# Altium PCB Copy of PCB1.PcbDoc (part 1 of 2)
Units mm, origin at the board's own origin, x right, y up, seen from the top; angles counter-clockwise.
Board outline 245 x 100 mm, 2 copper layers (Top Layer, Bottom Layer); 174 components, 196 nets, 709 pads, 287 vias.
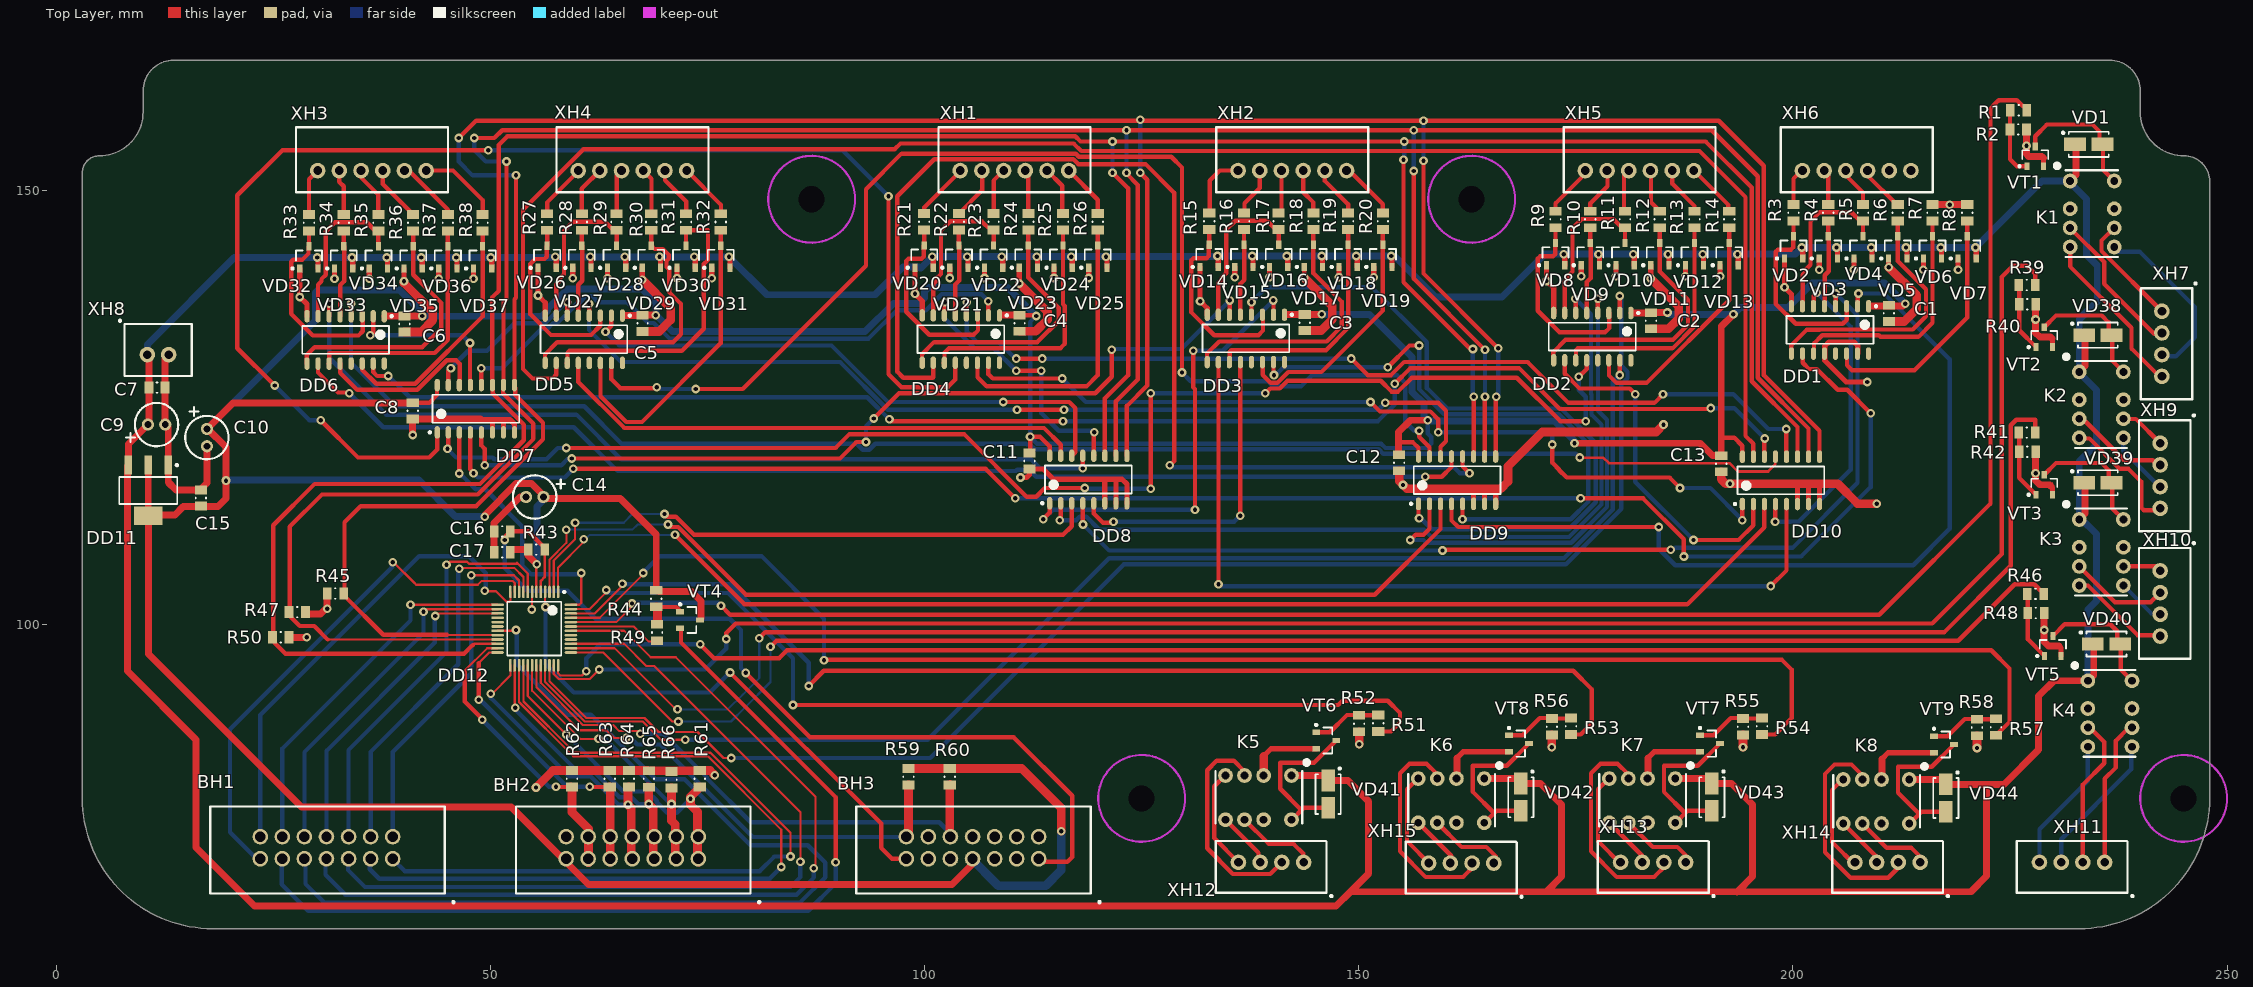
[diagram p0: Top Layer view]
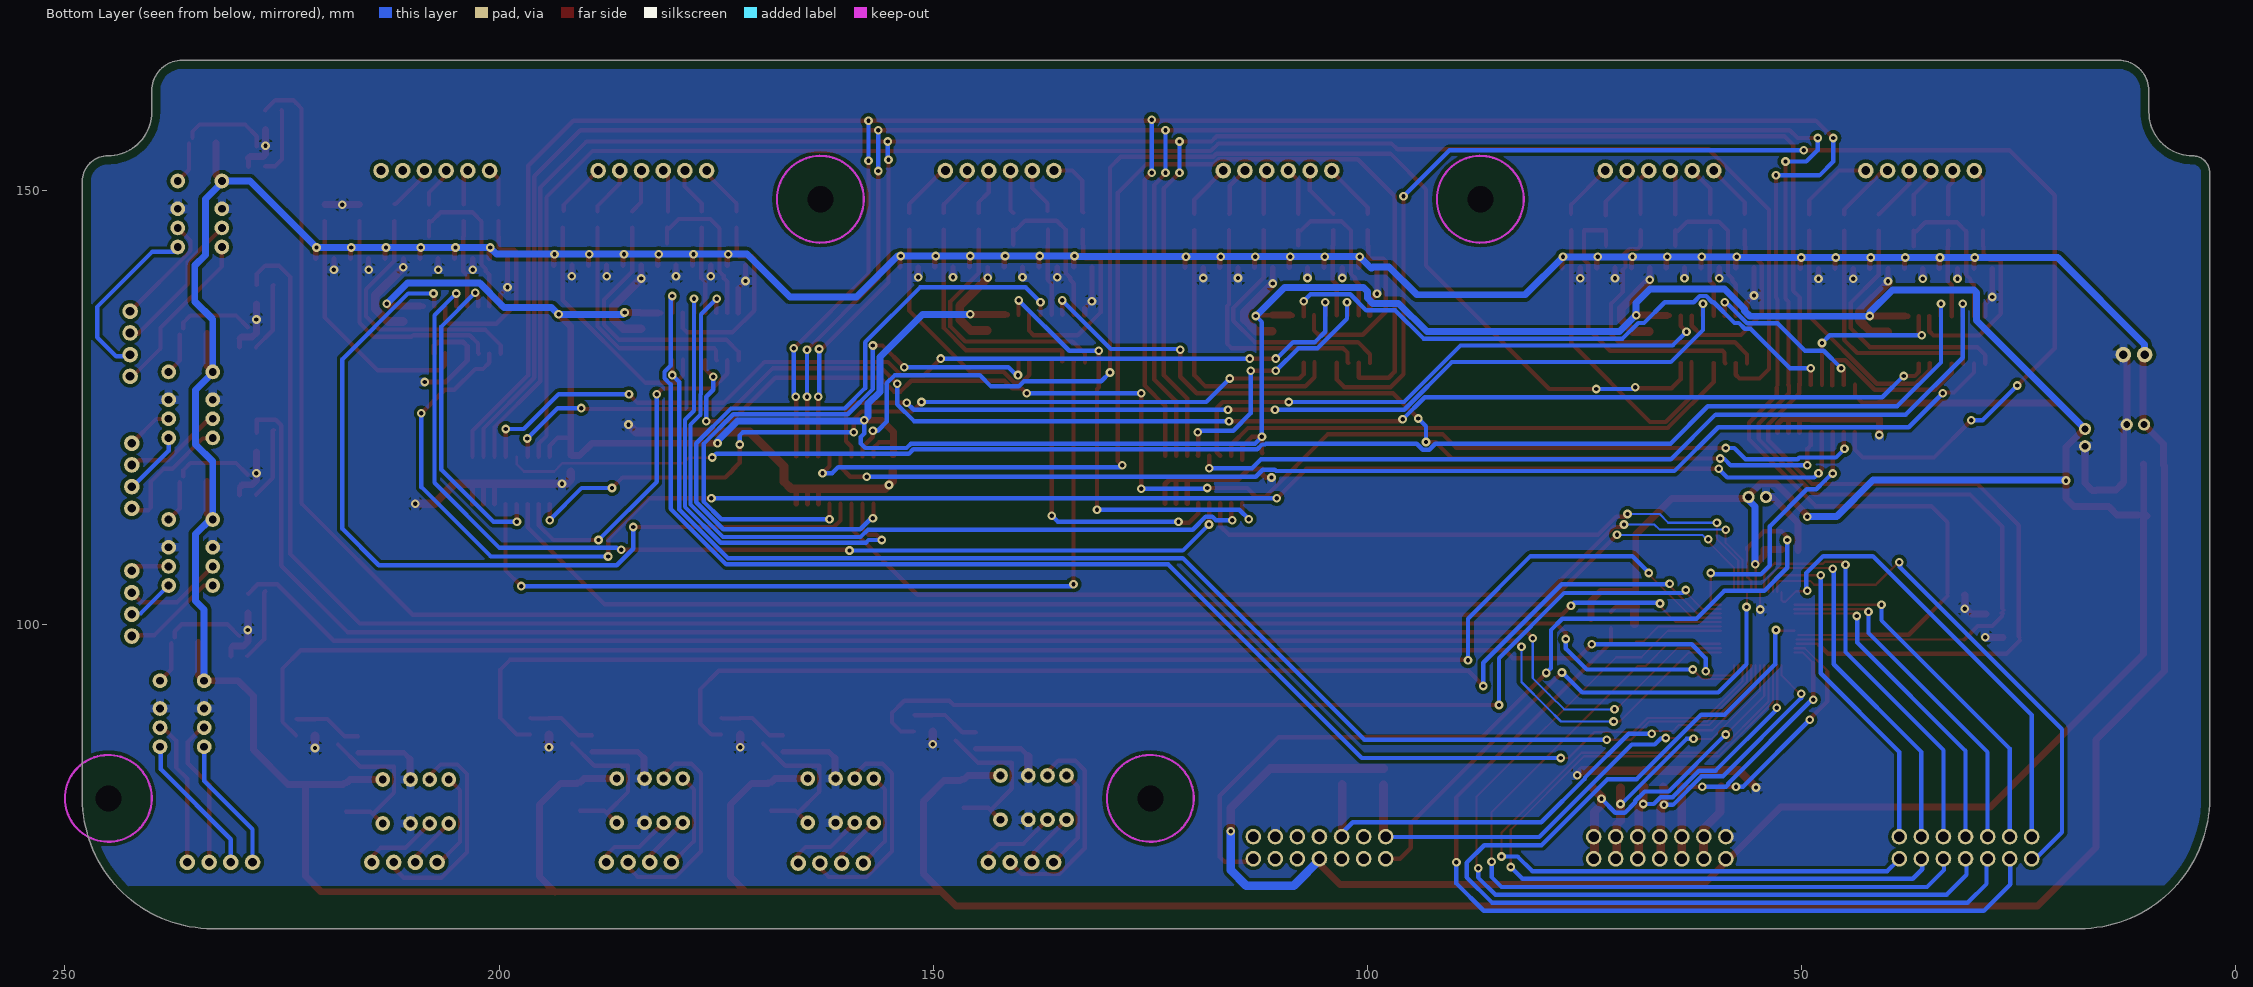
[diagram p1: Bottom Layer view, seen from below]

## Layer stack, top to bottom
Top Solder: solder mask 0.0102, Solder Resist, Dk 3.5
Top Layer: signal copper 0.0356
Dielectric 1: dielectric 0.32, FR-4, Dk 4.8
Bottom Layer: signal copper 0.0356
Bottom Solder: solder mask 0.0102, Solder Resist, Dk 3.5

## Board outline
3,80 3,152.05 cw(c4.95,152.05) 4.95,154 ccw(c4.95,159.05) 10,159.05 10,161.5 cw(c13.5,161.5) 13.5,165 236.5,165 cw(c236.5,161.5) 240,161.5 240,159.05 ccw(c245.05,159.05) 245.05,154 cw(c245.05,151.05) 248,151.05 248,80 cw(c233,80) 233,65 18,65 cw(c18,80)

## Design rules (kind name [scope] priority, off if disabled: settings)
BoardOutlineClearance [All] p1: gap=1 ignorepadtopadclearanceinfootprint=FALSE
Clearance Clearance_1 [All] p1: gap=0.15 ignorepadtopadclearanceinfootprint=FALSE except(0.4: Arc-Poly Track-Poly SMDPad-Poly THPad-Poly Via-Poly Fill-Poly Poly-Poly)
Clearance [All vs InPolygon] p2: gap=0.4 ignorepadtopadclearanceinfootprint=FALSE
PlaneConnect [All] p1: planeconnectstyle=Relief reliefexpansion=0.5 reliefentries=4 reliefconductorwidth=1 reliefairgap=0.5
PolygonConnect [All] p1: connectstyle=Relief reliefconductorwidth=1 reliefentries=4 polygonreliefangle="90 Angle" airgapwidth=0.4
RoutingVias [All] p1: holewidth=0.5 width=1 viastyle="Through Hole" minholewidth=0.5 minwidth=1 maxholewidth=0.5 maxwidth=1
SolderMaskExpansion [All] p1: expansion=0.102
Width Width_3 [InNet('+12')] p1: maxlimit=5 minlimit=0.3 preferedwidth=0.8
Width Width_2 [InNet('+3.3')] p2: maxlimit=8 minlimit=0.3 preferedwidth=0.8
Width Width_1 [InNet('GND')] p3: maxlimit=5 minlimit=0.25 preferedwidth=0.8
Width [All] p4: maxlimit=5 minlimit=0.25 preferedwidth=1
29 further rules are at their usual default settings.

## Classes and differential pairs
channel class РЕЛЕ: U_РЕЛЕ1 U_РЕЛЕ2 U_РЕЛЕ3 U_РЕЛЕ4 U_РЕЛЕ5 U_РЕЛЕ6 U_РЕЛЕ7 U_РЕЛЕ8
component class СОЕД: XH2 XH6 XH9 XH10 XH11 XH12 XH14 XH15
component class U_РЕЛЕ8: K5 R51 R52 VD41 VT6
component class U_РЕЛЕ7: K6 R53 R56 VD42 VT8
component class U_РЕЛЕ6: K7 R54 R55 VD43 VT7
component class U_РЕЛЕ5: K1 R1 R2 VD1 VT4
component class U_РЕЛЕ4: K3 R41 R42 VD39 VT3
component class U_РЕЛЕ3: K4 R46 R48 VD40 VT5
component class U_РЕЛЕ2: K8 R57 R58 VD44 VT9
component class U_РЕЛЕ1: K2 R39 R40 VD38 VT2
channel class "ВХ Б (1-6)": "in b1" "in b2" "in b3" "in b4" "in b5" "in b6"
component class U_УПРАВЛ: BH1 BH2 BH3 C14 C16 C17 DD7 R10 R14 R17 R18 R20 R44 R59 R60 R61 R62 R66 VT4
component class U_СОГЛАСОВАНИЕ: C5 C6 C7 C9 C13 C14 C15 C17 DD4 DD6 DD7 DD8 DD11 R7 R8 R45 XH1 XH2 XH3 XH4 XH5 XH6 XH7
component class "in b6": C9 DD7 R10 R14 R44 R45 R59 R60 VD8 VD9 VD10 VD11 VD12 VD13
component class "in b5": C14 DD11 R17 R18 R20 R61 R62 R66 VD14 VD15 VD16 VD17 VD18 VD19
component class "in b4": C15 DD4 R21 R22 R23 R24 R25 R26 VD20 VD21 VD22 VD23 VD24 VD25
component class "in b3": C5 DD8 R27 R28 R29 R30 R31 R32 VD26 VD27 VD28 VD29 VD30 VD31
component class "in b2": C6 DD6 R33 R34 R35 R36 R37 R38 VD32 VD33 VD34 VD35 VD36 VD37
component class "in b1": C1 DD1 R3 R4 R5 R6 R7 R8 VD2 VD3 VD4 VD5 VD6 VD7

## Components (designator, comment, footprint, x,y, rotation, side; value= is the part's Value field where it differs from the comment)
BH1 "BH14(2)" "BH-14 (DS1013-14S) (IDC-14MS)" 38.74,73.05 r180 top (schematic designator BH2)
BH2 "BH14(3)" "BH-14 (DS1013-14S) (IDC-14MS)" 73.95,73.05 r180 top (schematic designator BH3)
BH3 "BH-14 (DS1013-14S) (IDC-14MS)" "BH-14 (DS1013-14S) (IDC-14MS)" 113.14,73.05 r180 top (schematic designator BH1)
C1 "C(ceramic)" C(ceramic) 211.05,135.85 r270 top
C2 "C(ceramic)" C(ceramic) 183.669,135 r270 top (schematic designator C1)
C3 "C(ceramic)" C(ceramic) 143.779,134.8 r270 top (schematic designator C1)
C4 "C(ceramic)" C(ceramic) 110.95,134.725 r270 top (schematic designator C1)
C5 "C(ceramic)" C(ceramic) 67.529,134.7 r270 top (schematic designator C1)
C6 "C(ceramic)" C(ceramic) 40.1,134.629 r270 top (schematic designator C1)
C7 "C(ceramic)" C(ceramic) 11.6,127.304 r180 top (schematic designator C3)
C8 "C(ceramic)" C(ceramic) 41.05,124.625 r90 top (schematic designator C6)
C9 "C(AlEL)" C(AlEL) 12.55,123.05 r180 top (schematic designator C2)
C10 "C(AlEL)" C(AlEL) 17.35,120.554 r90 top (schematic designator C5)
C11 "C(ceramic)" C(ceramic) 112.081,118.85 r90 top (schematic designator C7)
C12 "C(ceramic)" C(ceramic) 154.65,118.65 r90 top (schematic designator C8)
C13 "C(ceramic)" C(ceramic) 191.75,118.55 r90 top (schematic designator C9)
C14 "C(AlEL)" C(AlEL) 54.1,114.711 r0 top (schematic designator C11)
C15 "C(ceramic)" C(ceramic) 16.65,114.6 r270 top (schematic designator C4)
C16 "C(ceramic)" C(ceramic) 51.35,110.75 r0 top (schematic designator C10)
C17 "C(ceramic)" C(ceramic) 51.35,108.35 r0 top (schematic designator C12)
DD1 "74HC4050" 74HC4050(51) 204.276,133.954 r270 top
DD2 "74HC4050" 74HC4050(51) 176.895,133.175 r270 top (schematic designator DD1)
DD3 "74HC4050" 74HC4050(51) 137.005,132.975 r270 top (schematic designator DD1)
DD4 "74HC4050" 74HC4050(51) 104.176,132.9 r270 top (schematic designator DD1)
DD5 "74HC4050" 74HC4050(51) 60.755,132.875 r270 top (schematic designator DD1)
DD6 "74HC4050" 74HC4050(51) 33.326,132.804 r270 top (schematic designator DD1)
DD7 "74HC4051" 74HC4050(51) 48.324,124.875 r90 top (schematic designator DD2)
DD8 "74HC4051" 74HC4050(51) 118.855,116.725 r90 top (schematic designator DD5)
DD9 "74HC4051" 74HC4050(51) 161.324,116.65 r90 top (schematic designator DD6)
DD10 "74HC4051" 74HC4050(51) 198.625,116.625 r90 top (schematic designator DD4)
DD11 "L1117" LDL1117 10.594,115.46 r270 top (schematic designator DD3)
DD12 "MSP430FR2355TPT" MSP430FR2355TPT 55.05,99.55 r270 top (schematic designator DD7)
K1 "IM06TS" IM06TS 231.929,151.1 r270 top
K2 "IM06TS" IM06TS 232.982,129.119 r270 top (schematic designator K1)
K3 "IM06TS" IM06TS 232.982,112.119 r270 top (schematic designator K1)
K4 "IM06TS" IM06TS 233.97,93.55 r270 top (schematic designator K1)
K5 "IM06TS" IM06TS 142.25,82.63 r180 top (schematic designator K1)
K6 "IM06TS" IM06TS 164.45,82.28 r180 top (schematic designator K1)
K7 "IM06TS" IM06TS 186.45,82.28 r180 top (schematic designator K1)
K8 "IM06TS" IM06TS 213.4,82.18 r180 top (schematic designator K1)
R1 "R" R 226,159.25 r180 top (schematic designator R21)
R2 "R" R 225.95,157.046 r180 top (schematic designator R22)
R3 "R" R 200.075,147.454 r270 top (schematic designator R1)
R4 "R" R 204.075,147.454 r270 top (schematic designator R2)
R5 "R" R 208.075,147.454 r270 top (schematic designator R3)
R6 "R" R 212.075,147.454 r270 top (schematic designator R4)
R7 "R" R 216.075,147.454 r270 top (schematic designator R5)
R8 "R" R 220.075,147.454 r270 top (schematic designator R6)
R9 "R" R 172.669,146.675 r270 top (schematic designator R1)
R10 "R" R 176.669,146.675 r270 top (schematic designator R2)
R11 "R" R 180.669,146.675 r270 top (schematic designator R3)
R12 "R" R 184.669,146.675 r270 top (schematic designator R4)
R13 "R" R 188.669,146.675 r270 top (schematic designator R5)
R14 "R" R 192.669,146.675 r270 top (schematic designator R6)
R15 "R" R 132.779,146.475 r270 top (schematic designator R1)
R16 "R" R 136.779,146.475 r270 top (schematic designator R2)
R17 "R" R 140.779,146.475 r270 top (schematic designator R3)
R18 "R" R 144.779,146.475 r270 top (schematic designator R4)
R19 "R" R 148.779,146.475 r270 top (schematic designator R5)
R20 "R" R 152.779,146.475 r270 top (schematic designator R6)
R21 "R" R 99.95,146.4 r270 top (schematic designator R1)
R22 "R" R 103.95,146.4 r270 top (schematic designator R2)
R23 "R" R 107.95,146.4 r270 top (schematic designator R3)
R24 "R" R 111.95,146.4 r270 top (schematic designator R4)
R25 "R" R 115.95,146.4 r270 top (schematic designator R5)
R26 "R" R 119.95,146.4 r270 top (schematic designator R6)
R27 "R" R 56.529,146.375 r270 top (schematic designator R1)
R28 "R" R 60.529,146.375 r270 top (schematic designator R2)
R29 "R" R 64.529,146.375 r270 top (schematic designator R3)
R30 "R" R 68.529,146.375 r270 top (schematic designator R4)
R31 "R" R 72.529,146.375 r270 top (schematic designator R5)
R32 "R" R 76.529,146.375 r270 top (schematic designator R6)
R33 "R" R 29.1,146.304 r270 top (schematic designator R1)
R34 "R" R 33.1,146.304 r270 top (schematic designator R2)
R35 "R" R 37.1,146.304 r270 top (schematic designator R3)
R36 "R" R 41.1,146.304 r270 top (schematic designator R4)
R37 "R" R 45.1,146.304 r270 top (schematic designator R5)
R38 "R" R 49.1,146.304 r270 top (schematic designator R6)
R39 "R" R 226.952,139.119 r180 top (schematic designator R21)
R40 "R" R 227.002,136.915 r180 top (schematic designator R22)
R41 "R" R 226.952,122.119 r180 top (schematic designator R21)
R42 "R" R 227.002,119.915 r180 top (schematic designator R22)
R43 "R" R 55.3,108.65 r180 top (schematic designator R10)
R44 "R" R 69.1,103.014 r90 top (schematic designator R13)
R45 "R" R 32.15,103.6 r0 top (schematic designator R9)
R46 "R" R 227.941,103.55 r180 top (schematic designator R21)
R47 "R" R 27.75,101.45 r180 top (schematic designator R8)
R48 "R" R 227.991,101.346 r180 top (schematic designator R22)
R49 "R" R 69.2,99.1 r90 top (schematic designator R14)
R50 "R" R 25.85,98.55 r180 top (schematic designator R7)
R51 "R" R 152.25,88.659 r90 top (schematic designator R21)
R52 "R" R 150.046,88.609 r90 top (schematic designator R22)
R53 "R" R 174.45,88.309 r90 top (schematic designator R21)
R54 "R" R 196.45,88.309 r90 top (schematic designator R21)
R55 "R" R 194.246,88.259 r90 top (schematic designator R22)
R56 "R" R 172.246,88.259 r90 top (schematic designator R22)
R57 "R" R 223.4,88.209 r90 top (schematic designator R21)
R58 "R" R 221.196,88.159 r90 top (schematic designator R22)
R59 "R" R 98.15,82.5 r90 top (schematic designator R12)
R60 "R" R 102.9,82.5 r90 top (schematic designator R11)
R61 "R" R 74.1,82.256 r270 top (schematic designator R15)
R62 "R" R 59.396,82.256 r270 top (schematic designator R19)
R63 "R" R 63.737,82.256 r270 top (schematic designator R20)
R64 "R" R 65.942,82.256 r270 top (schematic designator R18)
R65 "R" R 68.25,82.25 r270 top (schematic designator R17)
R66 "R" R 70.85,82.156 r270 top (schematic designator R16)
VD1 "SS14" SS14 234.07,155.329 r0 top (schematic designator VD7)
VD2 "BAV99" BAV99 200.075,143.454 r90 top (schematic designator VD1)
VD3 "BAV99" BAV99 204.075,143.454 r90 top (schematic designator VD2)
VD4 "BAV99" BAV99 208.075,143.454 r90 top (schematic designator VD3)
VD5 "BAV99" BAV99 212.075,143.454 r90 top (schematic designator VD4)
VD6 "BAV99" BAV99 216.075,143.454 r90 top (schematic designator VD5)
VD7 "BAV99" BAV99 220.075,143.454 r90 top (schematic designator VD6)
VD8 "BAV99" BAV99 172.669,142.675 r90 top (schematic designator VD1)
VD9 "BAV99" BAV99 176.669,142.675 r90 top (schematic designator VD2)
VD10 "BAV99" BAV99 180.669,142.675 r90 top (schematic designator VD3)
VD11 "BAV99" BAV99 184.669,142.675 r90 top (schematic designator VD4)
VD12 "BAV99" BAV99 188.669,142.675 r90 top (schematic designator VD5)
VD13 "BAV99" BAV99 192.669,142.675 r90 top (schematic designator VD6)
VD14 "BAV99" BAV99 132.779,142.475 r90 top (schematic designator VD1)
VD15 "BAV99" BAV99 136.779,142.475 r90 top (schematic designator VD2)
VD16 "BAV99" BAV99 140.779,142.475 r90 top (schematic designator VD3)
VD17 "BAV99" BAV99 144.779,142.475 r90 top (schematic designator VD4)
VD18 "BAV99" BAV99 148.779,142.475 r90 top (schematic designator VD5)
VD19 "BAV99" BAV99 152.779,142.475 r90 top (schematic designator VD6)
VD20 "BAV99" BAV99 99.95,142.4 r90 top (schematic designator VD1)
VD21 "BAV99" BAV99 103.95,142.4 r90 top (schematic designator VD2)
VD22 "BAV99" BAV99 107.95,142.4 r90 top (schematic designator VD3)
VD23 "BAV99" BAV99 111.95,142.4 r90 top (schematic designator VD4)
VD24 "BAV99" BAV99 115.95,142.4 r90 top (schematic designator VD5)
VD25 "BAV99" BAV99 119.95,142.4 r90 top (schematic designator VD6)
VD26 "BAV99" BAV99 56.529,142.375 r90 top (schematic designator VD1)
VD27 "BAV99" BAV99 60.529,142.375 r90 top (schematic designator VD2)
VD28 "BAV99" BAV99 64.529,142.375 r90 top (schematic designator VD3)
VD29 "BAV99" BAV99 68.529,142.375 r90 top (schematic designator VD4)
VD30 "BAV99" BAV99 72.529,142.375 r90 top (schematic designator VD5)
VD31 "BAV99" BAV99 76.529,142.375 r90 top (schematic designator VD6)
VD32 "BAV99" BAV99 29.1,142.304 r90 top (schematic designator VD1)
VD33 "BAV99" BAV99 33.1,142.304 r90 top (schematic designator VD2)
VD34 "BAV99" BAV99 37.1,142.304 r90 top (schematic designator VD3)
VD35 "BAV99" BAV99 41.1,142.304 r90 top (schematic designator VD4)
VD36 "BAV99" BAV99 45.1,142.304 r90 top (schematic designator VD5)
VD37 "BAV99" BAV99 49.1,142.304 r90 top (schematic designator VD6)
VD38 "SS14" SS14 235.122,133.348 r0 top (schematic designator VD7)
VD39 "SS14" SS14 235.122,116.348 r0 top (schematic designator VD7)
VD40 "SS14" SS14 236.111,97.779 r0 top (schematic designator VD7)
VD41 "SS14" SS14 146.479,80.489 r270 top (schematic designator VD7)
VD42 "SS14" SS14 168.679,80.139 r270 top (schematic designator VD7)
VD43 "SS14" SS14 190.679,80.139 r270 top (schematic designator VD7)
VD44 "SS14" SS14 217.629,80.039 r270 top (schematic designator VD7)
VT1 "BC837(КТ3130)" BC847(IRLML6402) 227.9,153.942 r90 top (schematic designator VT2)
VT2 "BC837(КТ3130)" BC847(IRLML6402) 228.953,133.119 r90 top
VT3 "BC837(КТ3130)" BC847(IRLML6402) 228.953,116.119 r90 top (schematic designator VT2)
VT4 "IRLML6402" BC847(IRLML6402) 73,100.55 r0 top (schematic designator VT1)
VT5 "BC837(КТ3130)" BC847(IRLML6402) 229.941,97.55 r90 top (schematic designator VT2)
VT6 "BC837(КТ3130)" BC847(IRLML6402) 146.25,86.659 r0 top (schematic designator VT2)
VT7 "BC837(КТ3130)" BC847(IRLML6402) 190.45,86.309 r0 top (schematic designator VT2)
VT8 "BC837(КТ3130)" BC847(IRLML6402) 168.45,86.309 r0 top (schematic designator VT2)
VT9 "BC837(КТ3130)" BC847(IRLML6402) 217.4,86.209 r0 top (schematic designator VT2)
XH1 "ХH(6)" XH(6) 104.1,152.304 r0 top (schematic designator XH4)
XH2 "ХH(6)" XH(6) 136.1,152.304 r0 top (schematic designator XH5)
XH3 "ХH(6)" XH(6) 30.1,152.304 r0 top (schematic designator XH1)
XH4 "ХH(6)" XH(6) 60.1,152.304 r0 top (schematic designator XH3)
XH5 "ХH(6)" XH(6) 176.1,152.304 r0 top (schematic designator XH6)
XH6 "ХH(6)" XH(6) 201.1,152.304 r0 top (schematic designator XH7)
XH7 "ХН(4)" ХН(4) 242.5,136.1 r270 top (schematic designator XH11)
XH8 "ХН(2)" ХН(2) 10.492,131.11 r0 top (schematic designator XH2)
XH9 "ХН(4)" ХН(4) 242.3,120.9 r270 top (schematic designator XH15)
XH10 "ХН(4)" ХН(4) 242.3,106.2 r270 top (schematic designator XH12)
XH11 "ХН(4)" ХН(4) 235.9,72.63 r180 top (schematic designator XH13)
XH12 "ХН(4)" ХН(4) 143.65,72.63 r180 top (schematic designator XH8)
XH13 "ХН(4)" ХН(4) 187.65,72.63 r180 top (schematic designator XH10)
XH14 "ХН(4)" ХН(4) 214.65,72.63 r180 top
XH15 "ХН(4)" ХН(4) 165.55,72.55 r180 top (schematic designator XH9)

## Footprints (in the part's own frame and the unit in brackets; to place one, negate y for a bottom-side part, rotate by r counter-clockwise, add the part's x,y. Pads: shape width x height; smd on the part's side, far side on the other; paste and mask are expansions set on the pad)
74HC4050(51) [mm]
  oval 1.45x0.6 smd: 1(-2.725,4.445) 2(-2.725,3.175) 3(-2.725,1.905) 4(-2.725,0.635) 5(-2.725,-0.635) 6(-2.725,-1.905) 7(-2.725,-3.175) 8(-2.725,-4.445) 9(2.725,-4.445) 10(2.725,-3.175) 11(2.725,-1.905) 12(2.725,-0.635) 13(2.725,0.635) 14(2.725,1.905) 15(2.725,3.175) 16(2.725,4.445)
  silkscreen extent -2.85,-5 1.6,5.42, body extent -3,-5 3,5, height 1.75
BAV99 [mm] "SOT23, 3-Leads, Body 2,90x2,45mm, Pitch 1,05mm, IPC Medium Density"
  rect 0.95x0.6 smd: 1(-1.275,1.05) 2(-1.275,-1.05) 3(1.275,0)
  silkscreen extent -1.4,-1.5 0.8,2.02, body extent -1.4,-1.5 1.4,1.5, height 1.3
BC847(IRLML6402) [mm] "SOT23, 3-Leads, Body 2,80x2,30mm, Pitch 0,95mm, IPC Medium Density"
  rect 0.9x0.6 smd: 1(-1.15,0.95) 2(-1.15,-0.95) 3(1.15,0)
  silkscreen extent -1.27,-1.5 0.7,1.92, body extent -1.3,-1.5 1.3,1.5, height 1.1
"BH-14 (DS1013-14S) (IDC-14MS)" [mm]
  round 1.8 hole 1.2: 1(0,0) 2(2.54,0) 3(5.08,0) 4(7.62,0) 5(10.16,0) 6(12.7,0) 7(15.24,0) 8(0,-2.54) 9(2.54,-2.54) 10(5.08,-2.54) 11(7.62,-2.54) 12(10.16,-2.54) 13(12.7,-2.54) 14(15.24,-2.54)
  silkscreen extent -7.13,-6 21,5.12, body extent -5.1,-5.7 20.3,3.65, height 10.25
C(AlEL) [mm]
  round 1.4 hole 0.8: 1(2,0) 2(0,0)
  silkscreen extent -1.5,-2.5 4.5,2.5, body extent -1.5,-2.5 3.5,2.5, height 12
C(ceramic) [mm] "Chip Capacitor, 2-Leads, Body 2,00x1,25mm, IPC Medium Density"
  rect 1x1.4 smd: 1(-0.925,0) 2(0.925,0)
  silkscreen extent -0.05,-0.6 0.05,0.6, body extent -1,-0.63 1,0.63, height 1.3
IM06TS [mm]
  round 1.7 hole 0.9: 1(0,0) 2(3.2,0) 3(5.4,0) 4(7.6,0) 5(7.6,5.08) 6(5.4,5.08) 7(3.2,5.08) 8(0,5.08)
  silkscreen extent -2,-1.75 8.75,5.5, body extent -1.25,-0.5 8.75,5.5, height 5.4
LDL1117 [mm]
  rect 2.15x0.9 smd: 1(-2.925,2.3) 2(-2.925,0) 3(-2.925,-2.3)
  rect 2.15x3.25 smd: 2(2.925,0)
  silkscreen extent -3.05,-3.35 1.55,3.43, body extent -3.5,-3.35 3.5,3.35, height 1.8
MSP430FR2355TPT [mm] "TSQFP, 48-Leads, Body 7,00x7,00mm, Pitch 0,50mm, IPC Medium Density"
  oval 1.45x0.3 smd: 1(-4.225,2.75) 2(-4.225,2.25) 3(-4.225,1.75) 4(-4.225,1.25) 5(-4.225,0.75) 6(-4.225,0.25) 7(-4.225,-0.25) 8(-4.225,-0.75) 9(-4.225,-1.25) 10(-4.225,-1.75) 11(-4.225,-2.25) 12(-4.225,-2.75) 25(4.225,-2.75) 26(4.225,-2.25) 27(4.225,-1.75) 28(4.225,-1.25) 29(4.225,-0.75) 30(4.225,-0.25) 31(4.225,0.25) 32(4.225,0.75) 33(4.225,1.25) 34(4.225,1.75) 35(4.225,2.25) 36(4.225,2.75)
  oval 0.3x1.45 smd: 13(-2.75,-4.225) 14(-2.25,-4.225) 15(-1.75,-4.225) 16(-1.25,-4.225) 17(-0.75,-4.225) 18(-0.25,-4.225) 19(0.25,-4.225) 20(0.75,-4.225) 21(1.25,-4.225) 22(1.75,-4.225) 23(2.25,-4.225) 24(2.75,-4.225) 37(2.75,4.225) 38(2.25,4.225) 39(1.75,4.225) 40(1.25,4.225) 41(0.75,4.225) 42(0.25,4.225) 43(-0.25,4.225) 44(-0.75,4.225) 45(-1.25,4.225) 46(-1.75,4.225) 47(-2.25,4.225) 48(-2.75,4.225)
  silkscreen extent -4.35,-3.1 3.1,3.58, body extent -4.5,-4.5 4.5,4.5, height 1.6
R [mm] "Chip Resistor, 2-Leads, Body 2,10x1,30mm, IPC Medium Density"
  rect 1x1.4 smd: 1(-0.95,0) 2(0.95,0)
  silkscreen extent -0.05,-0.6 0.05,0.6, body extent -1.1,-0.7 1.1,0.7, height 0.6
SS14 [mm] "Molded Diode, 2-Leads, Body 4,30x2,70mm, IPC Medium Density"
  rect 2.5x1.55 smd: 1(-1.575,0) 2(1.575,0)
  silkscreen extent -3.07,-1.45 2.3,1.45, body extent -2.52,-1.45 2.52,1.45, height 2.44
XH(6) [mm]
  round 1.8 hole 1: 1(0,0) 2(2.5,0) 3(5,0) 4(7.5,0) 5(10,0) 6(12.5,0)
  silkscreen extent -2.5,-2.5 15,5, body extent -2.45,-2.35 14.95,3.4, height 7
ХН(2) [mm]
  round 1.8 hole 1: 1(0,0) 2(2.45,0)
  silkscreen extent -3.27,-2.45 5.1,4.02, body extent -2.55,-2.32 4.95,3.38, height 7
ХН(4) [mm]
  round 1.8 hole 1: 1(0,0) 2(2.5,0) 3(5,0) 4(7.5,0)
  silkscreen extent -3.32,-2.45 10.13,4, body extent -2.53,-2.3 9.98,3.4, height 7

## Part data
DD11: library part LDL1117

## Free pads (board coordinates)
  round 1.6 hole 3 unplated: *(87,149) *(125,80) *(163,149) *(245,80)

## Via types
v1: diameter 1, hole 0.5, Top Layer to Bottom Layer, tented both sides, 287 vias

## Nets (pads, with @x,y where several pads share a name; then routed paths per layer and width w, separated by ;. In a path a pad name is that pad's centre, name@x,y a point inside that pad or via, vN(x,y) a via of type N, cw(c..) or ccw(c..) an arc to the next point about the centre after c; other vN are vias at no path point)
1Y1: DD6.2 DD7.13 | length 19
  Top Layer w0.5: v1(36.15,133.35) 36.501,133.701 DD6.2@36.501,135.529 ; DD7.13@47.65,127.65 v1(47.65,132.45)
  Bottom Layer w0.5: v1(36.15,133.35) 46.75,133.35 v1(47.65,132.45)
1Y2: DD5.2 DD8.14 | length 65.5
  Top Layer w0.5: v1(63.25,133.75) 63.93,134.43 DD5.2@63.93,135.6 ; v1(109.05,125.65) 116.65,125.65 117.35,124.95 117.35,119.85 DD8.14@116.95,119.45
  Bottom Layer w0.5: v1(63.25,133.75) 64.85,132.15 89.288,132.15 95.788,125.65 v1(109.05,125.65)
1Y3: DD4.2 DD7.12 | length 70
  Top Layer w0.5: DD7.12@48.95,127.609 DD7.12@48.959,127.6 v1(48.959,129.541) ; DD4.2@107.35,135.5 v1(107.35,137.25)
  Bottom Layer w0.5: v1(48.959,129.541) 51.341,129.541 55.875,134.075 56.541,134.075 57.216,134.75 57.723,134.75 60.123,137.15 60.277,137.15 60.977,137.85 61.723,137.85 62.423,137.15 65.75,137.15 68.15,134.75 68.819,134.75 70.619,132.95 93.55,132.95 96.8,136.2 100.127,136.2 101.977,138.05 106.55,138.05 v1(107.35,137.25)
1Y4: DD3.2 DD8.1 | length 51.9
  Top Layer w0.5: v1(113.65,112.15) 114.41,112.91 DD8.1@114.41,114 ; v1(130.95,131.55) 130.95,127.35 131.15,127.15 v1(131.15,113.25) ; v1(140.15,137.35) 140.18,137.32 DD3.2@140.18,135.7
  Bottom Layer w0.5: v1(113.65,112.15) 114.75,113.25 v1(131.15,113.25) ; v1@130.85,131.55 v1(130.95,131.55) 134.35,131.55 v1(140.15,137.35)
1Y6: DD1.2 DD9.4 | length 99.3
  Top Layer w0.5: DD9.4@160.689,113.925 160.689,112.011 161.45,111.25 v1(184.55,111.25) ; DD1.2@207.476,136.679 207.476,138.076 v1(207.55,138.15)
  Bottom Layer w0.5: v1(184.55,111.25) 184.55,108.75 186.45,106.85 213.85,106.85 218.05,111.05 218.05,130.577 210.477,138.15 v1(207.55,138.15)
2Y1: DD6.4 DD10.13 | length 179.2
  Top Layer w0.3: v1(175.45,119.25) 178.15,119.25 178.8,118.6 192.7,118.6 193.65,117.65 197.15,117.65 197.99,118.49 DD10.13@197.99,119.35
  Top Layer w0.5: v1(33.95,136.95) 33.961,136.939 DD6.4@33.961,135.529
  Bottom Layer w0.5: v1(33.95,136.95) 33.95,130.2 39,125.15 60.8,125.15 65.1,120.85 92.177,120.85 92.877,120.15 93.623,120.15 94.323,120.85 111.677,120.85 111.777,120.75 112.131,120.75 112.681,120.2 152.308,120.2 152.808,119.7 175,119.7 v1(175.45,119.25)
2Y2: DD5.4 DD9.14 | length 113.2
  Top Layer w0.5: DD5.4@61.35,135.64 DD5.4@61.39,135.6 61.39,136.91 v1(61.35,136.95) ; v1(110.65,124.75) v1(116.05,124.75) ; v1(153.05,125.55) 159.15,125.55 160.05,124.65 160.05,121.13 159.419,120.5 DD9.14@159.419,119.375
  Bottom Layer w0.5: v1(61.35,136.95) 61.35,133.95 65.05,130.25 90.269,130.25 95.769,124.75 v1(110.65,124.75) ; v1(116.05,124.75) 152.25,124.75 v1(153.05,125.55)
2Y3: DD4.4 DD10.12 | length 109.7
  Top Layer w0.5: DD4.4@104.811,135.625 104.811,137.111 v1(104.85,137.15) ; v1(110.55,130.65) v1(113.55,130.65) ; v1(149.15,130.65) 151.05,128.75 153.723,128.75 155.223,130.25 169.45,130.25 174.15,125.55 184.05,125.55 v1(185.05,126.55) ; v1(199.25,122.55) 199.25,119.36 DD10.12@199.26,119.35
  Bottom Layer w0.5: v1(104.85,137.15) 104.85,133.75 106.05,132.55 108.55,132.55 110.45,130.65 v1(110.55,130.65) ; v1(113.55,130.65) v1(149.15,130.65) ; v1(185.05,126.55) 193.15,126.55 197.15,122.55 v1(199.25,122.55) ; v1(149.15,130.65) 149.25,130.75 149.35,130.75 149.25,130.65 v1(149.15,130.65)
2Y4: DD3.4 DD9.1 | length 83
  Top Layer w0.5: DD3.4@137.64,135.7 137.65,135.69 v1(137.65,137.15) ; DD9.1@156.879,113.925 156.879,112.321 v1(156.95,112.25)
  Bottom Layer w0.5: v1(137.65,137.15) 139.35,138.85 151.523,138.85 157.85,132.523 157.85,127.25 160.2,124.9 173.292,124.9 177.3,120.892 177.3,114.108 174.184,110.992 158.4,110.992 157.142,112.25 v1(156.95,112.25)
2Y5: DD2.4 DD9.2 | length 56.2
  Top Layer w0.5: v1(155.95,109.75) 156.55,110.35 157.45,110.35 158.149,111.049 DD9.2@158.149,113.925 ; DD2.4@177.53,135.9 177.53,137.53 v1(177.55,137.55)
  Bottom Layer w0.5: v1(155.95,109.75) 157.45,109.75 157.75,109.45 174.48,109.45 178.6,113.57 178.6,123.6 177.55,124.65 v1(177.55,137.55)
2Y6: DD1.4 DD8.4 | length 120.4
  Top Layer w0.5: DD8.4@118.22,114 118.22,111.58 v1(118.25,111.55) ; v1(159.65,108.55) 159.75,108.65 v1(185.95,108.65) ; DD1.4@204.936,136.679 204.936,138.136 v1(204.95,138.15)
  Bottom Layer w0.5: v1(118.25,111.55) 121.25,108.55 v1(159.65,108.55) ; v1(185.95,108.65) 186.25,108.65 186.45,108.85 199.95,108.85 207.45,116.35 207.45,135.65 v1(204.95,138.15)
3Y1: DD6.6 DD8.13 | length 101.1
  Top Layer w0.5: DD6.6@31.421,135.529 31.421,136.921 v1(31.45,136.95) ; v1(118.22,118.02) DD8.13@118.22,119.45
  Bottom Layer w0.5: v1(31.45,136.95) 31.45,130.75 38,124.2 59.9,124.2 65.05,119.05 112.258,119.05 113.288,118.02 v1(118.22,118.02)
3Y2: DD5.6 DD7.15 | length 20.2
  Top Layer w0.5: DD7.15@45.149,127.6 45.149,129.249 v1(45.45,129.55) ; DD5.6@58.85,135.55 DD5.6@58.85,135.6 v1(58.85,137.15)
  Bottom Layer w0.5: v1(45.45,129.55) 47.45,131.55 49.6,131.55 52.775,134.725 56.271,134.725 58.696,137.15 v1(58.85,137.15)
3Y3: DD4.6 DD8.12 | length 31.8
  Top Layer w0.5: DD4.6@102.271,135.625 102.271,137.071 v1(102.35,137.15) ; v1(110.55,129.25) v1(113.45,129.25) ; DD8.12@119.55,119.51 DD8.12@119.49,119.45 119.49,122.09 v1(119.55,122.15)
  Bottom Layer w0.5: v1(102.35,137.15) 102.35,135.25 105.75,131.85 107.95,131.85 v1(110.55,129.25) ; v1(113.45,129.25) 113.45,124.35 115.45,122.35 119.35,122.35 v1(119.55,122.15)
3Y4: DD3.6 DD7.5 | length 102.2
  Top Layer w0.5: DD7.5@48.959,122.15 48.959,120.641 49.35,120.25 v1(49.35,118.35) ; v1(59.35,119.15) 90.25,119.15 92.15,121.05 v1(93.25,121.05) ; v1(94.15,123.75) 97.05,126.65 116.55,126.65 119.65,126.65 121.55,128.55 v1(121.55,131.65) ; DD3.6@135.1,135.7 135.15,135.75 v1(135.15,137.35)
  Bottom Layer w0.5: v1(49.35,118.35) 58.15,118.35 58.95,119.15 v1(59.35,119.15) ; v1(93.25,121.05) 93.25,122.85 v1(94.15,123.75) ; v1(121.55,131.65) 121.55,131.75 129.55,131.75 v1(135.15,137.35)
3Y5: DD2.6 DD8.2 | length 93.7
  Top Layer w0.5: v1(115.55,112.05) 115.68,112.18 DD8.2@115.68,114 ; v1(174.95,137.55) 174.99,137.51 DD2.6@174.99,135.9
  Bottom Layer w0.5: v1(115.55,112.05) 117.477,112.05 117.877,112.45 118.623,112.45 120.123,110.95 157.523,110.95 158.373,110.1 174.211,110.1 177.95,113.839 177.95,123.05 176.8,124.2 176.8,126.519 176.75,126.569 176.75,135.75 v1(174.95,137.55)
3Y6: DD1.6 DD10.4 | length 37
  Top Layer w0.5: v1(197.95,111.85) 197.95,113.86 DD10.4@197.99,113.9 ; DD1.6@202.396,136.679 202.396,137.896 v1(202.75,138.25)
  Bottom Layer w0.5: v1(197.95,111.85) 200.65,111.85 206.65,117.85 206.65,134.35 v1(202.75,138.25)
4Y1: DD6.10 DD9.13 | length 138.3
  Top Layer w0.5: DD6.10@30.151,130.079 30.151,129.049 32.45,126.75 33.65,126.75 v1(33.75,126.65) ; v1(157.65,117.05) 159.567,117.05 160.689,118.172 DD9.13@160.689,119.375
  Bottom Layer w0.5: v1(33.75,126.65) 37.65,122.75 59.6,122.75 64.65,117.7 110.527,117.7 110.677,117.85 112.05,117.85 112.85,117.05 v1(157.65,117.05)
4Y2: DD5.10 DD10.15 | length 201
  Top Layer w0.5: DD5.10@57.58,130.15 57.58,128.78 57.15,128.35 54.85,128.35 53.75,129.45 53.75,147.792 60.708,154.75 96.55,154.75 97.219,155.419 117.162,155.419 118.031,154.55 189.25,154.55 194.55,149.25 194.55,121.75 195.45,120.85 DD10.15@195.45,119.35
4Y3: DD4.10 DD9.12 | length 130.3
  Top Layer w0.5: DD4.10@101.001,130.175 101.001,128.501 100.95,128.45 97.55,128.45 96.85,129.15 96.85,149.35 101.104,153.604 117.139,153.604 117.693,153.05 125.436,153.05 128.75,149.736 128.75,118.85 v1(128.25,118.35) ; DD9.12@161.959,119.375 161.959,118.241 v1(162.75,117.45)
  Bottom Layer w0.5: v1(128.25,118.35) 128.45,118.15 160.95,118.15 161.65,117.45 v1(162.75,117.45)
4Y4: DD3.10 DD10.5 | length 99.5
  Top Layer w0.5: DD3.10@133.83,130.25 133.85,130.23 v1(133.85,104.65) ; v1(197.45,104.45) 199.26,106.26 DD10.5@199.26,113.9
  Bottom Layer w0.5: v1(133.85,104.65) 134.05,104.45 v1(197.45,104.45)
4Y5: DD2.10 DD10.2 | length 40.3
  Top Layer w0.5: DD2.10@173.72,130.45 173.72,128.907 175.427,127.2 181.2,127.2 v1(181.85,126.55) ; v1(188.55,109.75) 193.75,109.75 195.45,111.45 DD10.2@195.45,113.9
  Bottom Layer w0.5: v1(181.85,126.55) 181.85,116.45 v1(188.55,109.75)
4Y6: DD1.10 DD7.4 | length 194.8
  Top Layer w0.5: DD7.4@47.689,122.15 47.689,117.911 48.05,117.55 v1(48.05,117.45) ; v1(59.55,117.95) 107.05,117.95 v1(110.45,114.55) ; v1(175.55,114.55) 182.75,114.55 187.45,109.85 v1(187.45,107.85) ; DD1.10@201.126,131.229 201.126,130.174 201.85,129.45 202.76,129.45 205.16,127.05 206.25,127.05 v1(208.95,124.35)
  Bottom Layer w0.5: v1(48.05,117.45) 48.55,116.95 58.55,116.95 v1(59.55,117.95) ; v1(110.45,114.55) v1(175.55,114.55) ; v1(187.45,107.85) 200.95,107.85 208.95,115.85 v1(208.95,124.35)
5Y1: DD6.12 DD7.14 | length 19.7
  Top Layer w0.5: DD6.12@32.691,130.079 32.691,129.009 34.65,127.05 41.569,127.05 44.969,130.45 46.05,130.45 46.45,130.05 DD7.14@46.45,127.55
5Y2: DD5.12 DD8.15 | length 62.1
  Top Layer w0.5: DD5.12@60.15,130.12 DD5.12@60.12,130.15 60.12,127.961 65.431,122.65 113.75,122.65 115.68,120.72 DD8.15@115.68,119.45
5Y3: DD4.12 DD7.1 | length 158.7
  Top Layer w0.5: v1(25.15,127.55) 20.85,131.85 20.85,149.45 26.05,154.65 v1(49.75,154.65) ; v1(30.45,123.55) 34.75,119.25 42.95,119.25 43.879,120.179 DD7.1@43.879,122.15 ; v1(95.85,149.35) 95.85,128.85 97.35,127.35 102.65,127.35 103.541,128.241 DD4.12@103.541,130.175
  Bottom Layer w0.5: v1(25.15,127.55) 29.15,123.55 v1(30.45,123.55) ; v1(49.75,154.65) 90.55,154.65 v1(95.85,149.35)
5Y4: DD3.12 DD8.5 | length 36.5
  Top Layer w0.5: DD8.5@119.49,114 119.49,112.81 120.55,111.75 121.65,111.75 v1(121.75,111.85) ; v1(136.35,112.55) 136.35,130.23 DD3.12@136.37,130.25
  Bottom Layer w0.5: v1(121.75,111.85) 135.65,111.85 v1(136.35,112.55)
5Y5: DD2.12 DD7.2 | length 160.8
  Top Layer w0.5: v1(45.05,120.25) 45.149,120.349 DD7.2@45.149,122.15 ; v1(58.75,120.35) 89.75,120.35 91.35,121.95 104.55,121.95 111.75,114.75 112.85,114.75 113.85,115.75 v1(118.45,115.75) v1@118.55,115.75 ; v1(126.05,115.65) v1(126.05,126.65) ; v1(139.25,126.65) 139.8,127.2 140.892,127.2 141.792,128.1 152.527,128.1 153.777,126.85 154.523,126.85 156.123,128.45 168.2,128.45 173.2,123.45 v1(176.15,123.45) ; v1(175.35,128.55) 176.26,129.46 DD2.12@176.26,130.45
  Bottom Layer w0.5: v1(45.05,120.25) 46.05,119.25 50.25,119.25 50.45,119.05 56.45,119.05 57.75,120.35 v1(58.75,120.35) ; v1(118.45,115.75) 118.55,115.65 v1(126.05,115.65) ; v1(126.05,126.65) v1(139.25,126.65) ; v1(175.35,128.55) 175.35,127.05 176.15,126.25 v1(176.15,123.45)
6Y1: DD6.15 DD10.14 | length 173
  Top Layer w0.5: DD6.15@36.501,130.079 36.501,129.099 36.95,128.65 v1(38.25,128.65) ; v1(95.95,123.65) 96.15,123.45 v1(115.95,123.45) ; v1(154.15,127.75) 155.95,129.55 168.45,129.55 173.15,124.85 190.45,124.85 v1(190.55,124.95) ; DD10.14@196.72,119.35 196.72,121.42 v1(196.75,121.45)
  Bottom Layer w0.5: v1(38.25,128.65) 40.7,126.2 93.4,126.2 v1(95.95,123.65) ; v1(115.95,123.45) 152.223,123.45 154.15,125.377 v1(154.15,127.75) ; v1(190.55,124.95) 193.25,124.95 v1(196.75,121.45)
6Y2: DD5.15 DD9.15 | length 146
  Top Layer w0.5: DD5.15@63.93,130.15 63.93,128.27 64.95,127.25 69.05,127.25 v1(69.15,127.35) ; v1(73.65,127.15) 79.05,127.15 93.25,141.35 93.25,150.15 97.354,154.254 117.408,154.254 117.762,153.9 128.4,153.9 129.65,152.65 v1(129.65,129.05) ; v1(156.95,122.35) 156.95,121.65 158.149,120.451 DD9.15@158.149,119.375
  Bottom Layer w0.5: v1(69.15,127.35) 69.35,127.15 v1(73.65,127.15) ; v1(129.65,129.05) 130.65,128.05 139.55,128.05 140.15,127.45 143.35,127.45 144.65,128.75 154.423,128.75 155.35,127.823 155.35,123.4 156.4,122.35 v1(156.95,122.35)
6Y3: DD4.15 DD10.1 | length 99.7
  Top Layer w0.5: DD4.15@107.351,130.175 107.351,128.849 107.85,128.35 v1(115.85,128.35) ; v1(151.35,125.65) 152.45,124.55 158.25,124.55 159.15,123.65 v1(159.15,122.15) ; v1(172.3,120.75) 172.3,118.65 173.1,117.85 173.1,117.8 173.95,116.95 185.8,116.95 v1(187,115.75) ; v1(194.15,112.05) 194.18,112.08 DD10.1@194.18,113.9
  Bottom Layer w0.5: v1(115.85,128.35) 118.55,125.65 v1(151.35,125.65) ; v1(159.15,122.15) 171.95,122.15 172.3,121.8 v1(172.3,120.75) ; v1(187,115.75) 189.75,115.75 190.5,115.75 v1@194.15,112.1
6Y4: DD3.15 DD9.5 | length 70.5
  Top Layer w0.5: DD3.15@140.18,130.25 140.18,128.82 v1(140.25,128.75) ; v1(153.35,129.65) 155.85,132.15 v1(156.95,132.15) ; v1(161.95,112.15) 161.959,112.159 DD9.5@161.959,113.925
  Bottom Layer w0.5: v1(140.25,128.75) 140.45,128.75 141.35,129.65 v1(153.35,129.65) ; v1(156.95,132.15) 156.95,127.15 159.85,124.25 173.023,124.25 176.45,120.823 176.45,114.177 174.423,112.15 v1(161.95,112.15)
+3.3: BH2.7 BH3.4 C1.1 C2.1 C3.1 C4.1 C5.1 C6.1 C8.2 C10.1 C11.2 C12.2 C13.2 C14.1 C15.2 C17.2 DD1.1 DD2.1 DD3.1 DD4.1 DD5.1 DD6.1 DD7.16 DD8.16 DD9.16 DD10.16 DD11.2 DD12.6 R43.2 R44.2 R59.2 R60.2 VT4.3 | length 628.8
  Top Layer w0.3: DD12.6@55.3,103.775 55.3,106.9 v1(55.35,106.95)
  Top Layer w0.5: C8.2@41.05,125.55 42.95,125.55 43.85,126.45 DD7.16@43.85,127.65 ; C4.1@110.95,135.65 112.75,135.65 v1(112.85,135.55) ; C11.2@112.106,119.75 C11.2@112.081,119.775 112.15,119.844 v1(112.15,121.65) 113.3,121.65 114.4,120.55 DD8.16@114.4,119.35 ; DD8.16@114.41,118.99 DD8.16@114.41,119.45 ; 154.6,121 156.25,121 156.879,120.371 DD9.16@156.879,119.375 ; 191.8,121.55 193.25,121.55 194.18,120.62 DD10.16@194.18,119.35
  Top Layer w0.6: DD6.1@37.771,135.529 DD6.1@38.05,135.529 ; DD5.1@65.2,135.6 DD5.1@65.479,135.6 ; DD4.1@108.621,135.625 DD4.1@108.9,135.625 ; DD3.1@141.45,135.7 DD3.1@141.729,135.7 ; DD2.1@181.34,135.9 DD2.1@181.619,135.9 ; DD1.1@208.746,136.679 209.025,136.679
  Top Layer w0.8: DD11.2@10.235,112.535 10.414,112.715 10.55,112.85 10.594,112.894 DD11.2@10.594,118.385 10.6,118.392 DD11.2@10.6,118.5 ; DD11.2@10.55,112.492 DD11.2@10.594,112.535 ; DD11.2@10.6,112.8 10.6,96.65 28.25,79 52.4,79 58.3,73.1 BH2.7@58.9,73.1 ; DD11.2@11.75,112.65 11.19,112.65 13.65,112.65 14.625,113.625 18.625,113.625 19.55,114.55 19.55,120.45 17.448,122.552 C10.1@17.352,122.552 ; C10.1@17.35,122.55 C10.1@17.352,122.552 ; C10.1@17.35,122.554 C10.1@17.352,122.552 ; 38.075,135.554 C6.1@40.1,135.554 v1@42.146,135.554 ; C8.2@41.05,125.55 20.35,125.55 C10.1@17.352,122.552 ; v1(49.35,112.45) 49.35,112.65 52.95,116.25 54.75,116.25 56.45,114.55 64.95,114.55 69.1,110.4 R44.2@69.1,103.964 ; C17.2@52.275,108.65 R43.2@54.35,108.65 54.35,107.95 v1(55.35,106.95) ; BH2.7@58.71,73.05 58.71,72.69 61.3,70.1 103.15,70.1 BH3.4@105.9,72.85 ; 65.504,135.625 C5.1@67.529,135.625 ; C5.1@67.45,135.65 v1(69.05,135.65) ; R44.2@69.15,104.05 69.35,103.85 73.15,103.85 74.25,102.75 VT4.3@74.25,100.7 ; 108.925,135.65 C4.1@110.95,135.65 ; 141.754,135.725 C3.1@143.779,135.725 145.725,135.725 v1(145.75,135.75) ; C12.2@154.65,119.575 154.463,119.763 154.6,119.9 154.6,121 154.6,122.2 155.95,123.55 v1(157.95,123.55) ; v1(174.85,120.9) 189.3,120.9 190.725,119.475 191.675,119.475 191.75,119.55 191.75,134.35 v1(193.15,135.75) ; 181.644,135.925 C2.1@183.669,135.925 183.694,135.95 v1(185.55,135.95) ; 209.05,136.704 211.075,136.704 212.704,136.704 v1(212.95,136.95)
  Top Layer w1: v1@42.146,135.554 v1(42.15,135.55) ; R59.2@98.15,83.45 R60.2@103,83.45 ; R60.2@102.9,83.45 111.2,83.45 115.75,78.9 v1(115.75,76.2)
  Bottom Layer w0.5: v1(112.85,135.55) 112.15,134.85 v1(112.15,121.65) 112.95,120.85 152.577,120.85 153.077,120.35 157.823,120.35 158.35,120.877 158.35,121.623 157.95,122.023 v1(157.95,123.55)
  Bottom Layer w0.8: C10.1@17.35,122.55 29.85,135.05 29.85,138.25 30.15,138.55 39.55,138.55 42.15,135.95 v1(42.15,135.55) 42.175,135.525 55.94,135.525 56.555,136.14 56.555,136.34 58.865,138.65 67.45,138.65 69.05,137.05 v1(69.05,135.65) 70.95,133.75 93.15,133.75 96.4,137 98.515,137 99.385,137 100,137.615 100,138.4 100.45,138.85 109.55,138.85 v1(112.85,135.55) ; v1(19.55,116.6) 19.5,116.65 41.75,116.65 45.95,112.45 v1(49.35,112.45) ; v1(55.35,106.95) 55.35,113.6 C14.1@56.3,114.55 ; v1(145.75,135.75) 151.219,135.75 156.15,130.819 156.15,126.819 157.5,125.469 157.5,124 v1(157.95,123.55) 158.05,123.45 172.55,123.45 174.85,121.15 v1(174.85,120.9) ; v1(185.55,135.95) 185.75,135.75 v1(193.15,135.75) 193.95,136.55 199.432,136.55 199.707,136.825 202.232,139.35 210.55,139.35 v1(212.95,136.95)
  Bottom Layer w1: BH3.4@105.25,73.2 108.5,69.95 113.95,69.95 115.75,71.75 v1(115.75,76.2)
+12: C7.2 C9.1 DD11.3 K1.1 K2.1 K3.1 K4.1 K5.1 K6.1 K7.1 K8.1 VD1.1 VD2.2 VD3.2 VD4.2 VD5.2 VD6.2 VD7.2 VD8.2 VD9.2 VD10.2 VD11.2 VD12.2 VD13.2 VD14.2 VD15.2 VD16.2 VD17.2 VD18.2 VD19.2 VD20.2 VD21.2 VD22.2 VD23.2 VD24.2 VD25.2 VD26.2 VD27.2 VD28.2 VD29.2 VD30.2 VD31.2 VD32.2 VD33.2 VD34.2 VD35.2 VD36.2 VD37.2 VD38.1 VD39.1 VD40.1 VD41.1 VD42.1 VD43.1 VD44.1 XH8.1 | length 734.9
  Top Layer w0.6: VD32.2@30.15,141.029 v1@30.15,142.2 ; VD33.2@34.15,141.029 v1@34.15,142.2 ; VD34.2@38.15,141.029 v1@38.15,142.2 ; VD35.2@42.15,141.029 v1@42.15,142.2 ; VD36.2@46.15,141.029 v1@46.15,142.2 ; VD37.2@50.15,141.029 v1@50.15,142.2 ; VD26.2@57.579,141.1 v1@57.579,142.271 ; VD27.2@61.579,141.1 v1@61.579,142.271 ; VD28.2@65.579,141.1 v1@65.579,142.271 ; VD29.2@69.579,141.1 v1@69.579,142.271 ; VD30.2@73.579,141.1 v1@73.579,142.271 ; VD31.2@77.579,141.1 v1@77.579,142.271 ; VD20.2@101,141.125 v1@101,142.296 ; VD21.2@105,141.125 v1@105,142.296 ; VD22.2@109,141.125 v1@109,142.296 ; VD23.2@113,141.125 v1@113,142.296 ; VD24.2@117,141.125 v1@117,142.296 ; VD25.2@121,141.125 v1@121,142.296 ; VD14.2@133.829,141.2 v1@133.829,142.371 ; VD15.2@137.829,141.2 v1@137.829,142.371 ; VD16.2@141.829,141.2 v1@141.829,142.371 ; VD17.2@145.829,141.2 v1@145.829,142.371 ; VD18.2@149.829,141.2 v1@149.829,142.371 ; VD19.2@153.829,141.2 v1@153.829,142.371 ; VD8.2@173.719,141.4 v1@173.719,142.571 ; VD9.2@177.719,141.4 v1@177.719,142.571 ; VD10.2@181.719,141.4 v1@181.719,142.571 ; VD11.2@185.719,141.4 v1@185.719,142.571 ; VD12.2@189.719,141.4 v1@189.719,142.571 ; VD13.2@193.719,141.4 v1@193.719,142.571 ; VD2.2@201.125,142.179 v1@201.125,143.35 ; VD3.2@205.125,142.179 v1@205.125,143.35 ; VD4.2@209.125,142.179 v1@209.125,143.35 ; VD5.2@213.125,142.179 v1@213.125,143.35 ; VD6.2@217.125,142.179 v1@217.125,143.35 ; VD7.2@221.125,142.179 v1@221.125,143.35
  Top Layer w0.8: XH8.1@10.492,131.11 XH8.1@10.65,130.952 ; XH8.1@10.55,130.85 10.675,130.725 C7.2@10.675,127.304 10.675,123.175 C9.1@10.55,123.05 8.294,120.794 DD11.3@8.294,118.385 8.2,118.292 8.2,94.65 16.1,86.75 16.1,74.35 22.85,67.6 147.4,67.6 149.05,69.25 ; K5.1@142.25,82.63 146.02,82.63 VD41.1@146.4,82.25 ; VD41.1@146.75,82.15 146.85,82.05 148.75,82.05 151.15,79.65 151.15,71.35 149.05,69.25 ; K6.1@164.45,82.28 168.22,82.28 VD42.1@168.6,81.9 ; VD42.1@168.95,81.8 169.05,81.7 170.95,81.7 173.35,79.3 173.35,71 171.6,69.25 ; K7.1@186.45,82.28 190.22,82.28 VD43.1@190.6,81.9 ; VD43.1@190.95,81.8 191.05,81.7 192.95,81.7 195.35,79.3 195.35,71 193.6,69.25 ; 193.55,69.2 193.6,69.25 ; K8.1@213.4,82.18 217.17,82.18 VD44.1@217.55,81.8 ; VD44.1@217.9,81.7 218,81.6 222.3,81.6 ; K1.1@231.929,151.1 232.609,151.78 VD1.1@232.609,155.5 ; K3.1@232.982,112.119 233.662,112.799 VD39.1@233.662,116.519 ; K2.1@232.982,129.119 233.662,129.799 VD38.1@233.662,133.519 ; VD40.1@234.65,97.95 234.65,94.23 K4.1@233.97,93.55 230.05,93.55 228.3,91.8 228.3,85.6 224.3,81.6 222.3,81.6 ; 149.05,69.25 171.6,69.25 ; 171.6,69.25 193.6,69.25 ; 193.6,69.25 220.5,69.25 222.3,71.05 222.3,78.7 222.3,81.6
  Bottom Layer w0.8: XH8.1@10.492,131.11 10.492,132.292 20.5,142.3 v1(30.05,142.3) v1(34.05,142.3) v1(38.05,142.3) v1(42.05,142.3) v1(46.05,142.3) v1(50.05,142.3) 57.5,142.3 v1@57.55,142.35 ; v1(57.479,142.371) v1(61.479,142.371) v1(65.479,142.371) v1(69.479,142.371) v1(73.479,142.371) v1(77.479,142.371) 81.85,138 94.3,138 97.496,141.196 99.361,141.196 99.461,141.096 99.596,141.096 v1@100.85,142.35 ; v1(100.9,142.396) v1(104.9,142.396) v1(108.9,142.396) v1(112.9,142.396) v1(116.9,142.396) v1(120.9,142.396) 133.746,142.396 v1@133.821,142.471 ; v1(133.729,142.471) v1@133.821,142.471 ; v1@133.85,142.5 v1@133.821,142.471 ; v1@173.6,142.7 171.456,142.7 166.506,137.75 158.85,137.75 154.129,142.471 v1(153.729,142.471) v1(149.729,142.471) v1(145.729,142.471) v1(141.729,142.471) v1(137.729,142.471) v1@133.821,142.471 ; v1(173.619,142.671) v1(177.619,142.671) v1(181.619,142.671) v1(185.619,142.671) v1(189.619,142.671) v1(193.619,142.671) 200.321,142.671 v1@201.1,143.45 ; v1(201.025,143.45) v1(205.025,143.45) v1(209.025,143.45) v1(213.025,143.45) v1(217.025,143.45) v1(221.025,143.45) ; v1@221.05,143.45 228.7,151.1 K1.1@231.929,151.1 ; K1.1@231.818,151.031 233.818,149.031 233.818,142.582 235.05,141.35 235.05,137.25 232.982,135.182 K2.1@232.982,129.119 ; K2.1@232.85,129.15 234.95,127.05 234.95,120.75 232.982,118.782 K3.1@232.982,112.119 ; K3.1@233.15,112.25 234.95,110.45 234.95,102.75 233.97,101.77 K4.1@233.97,93.55